# EAGLE board Sensor8535 - eagle (EAGLE 4.09)
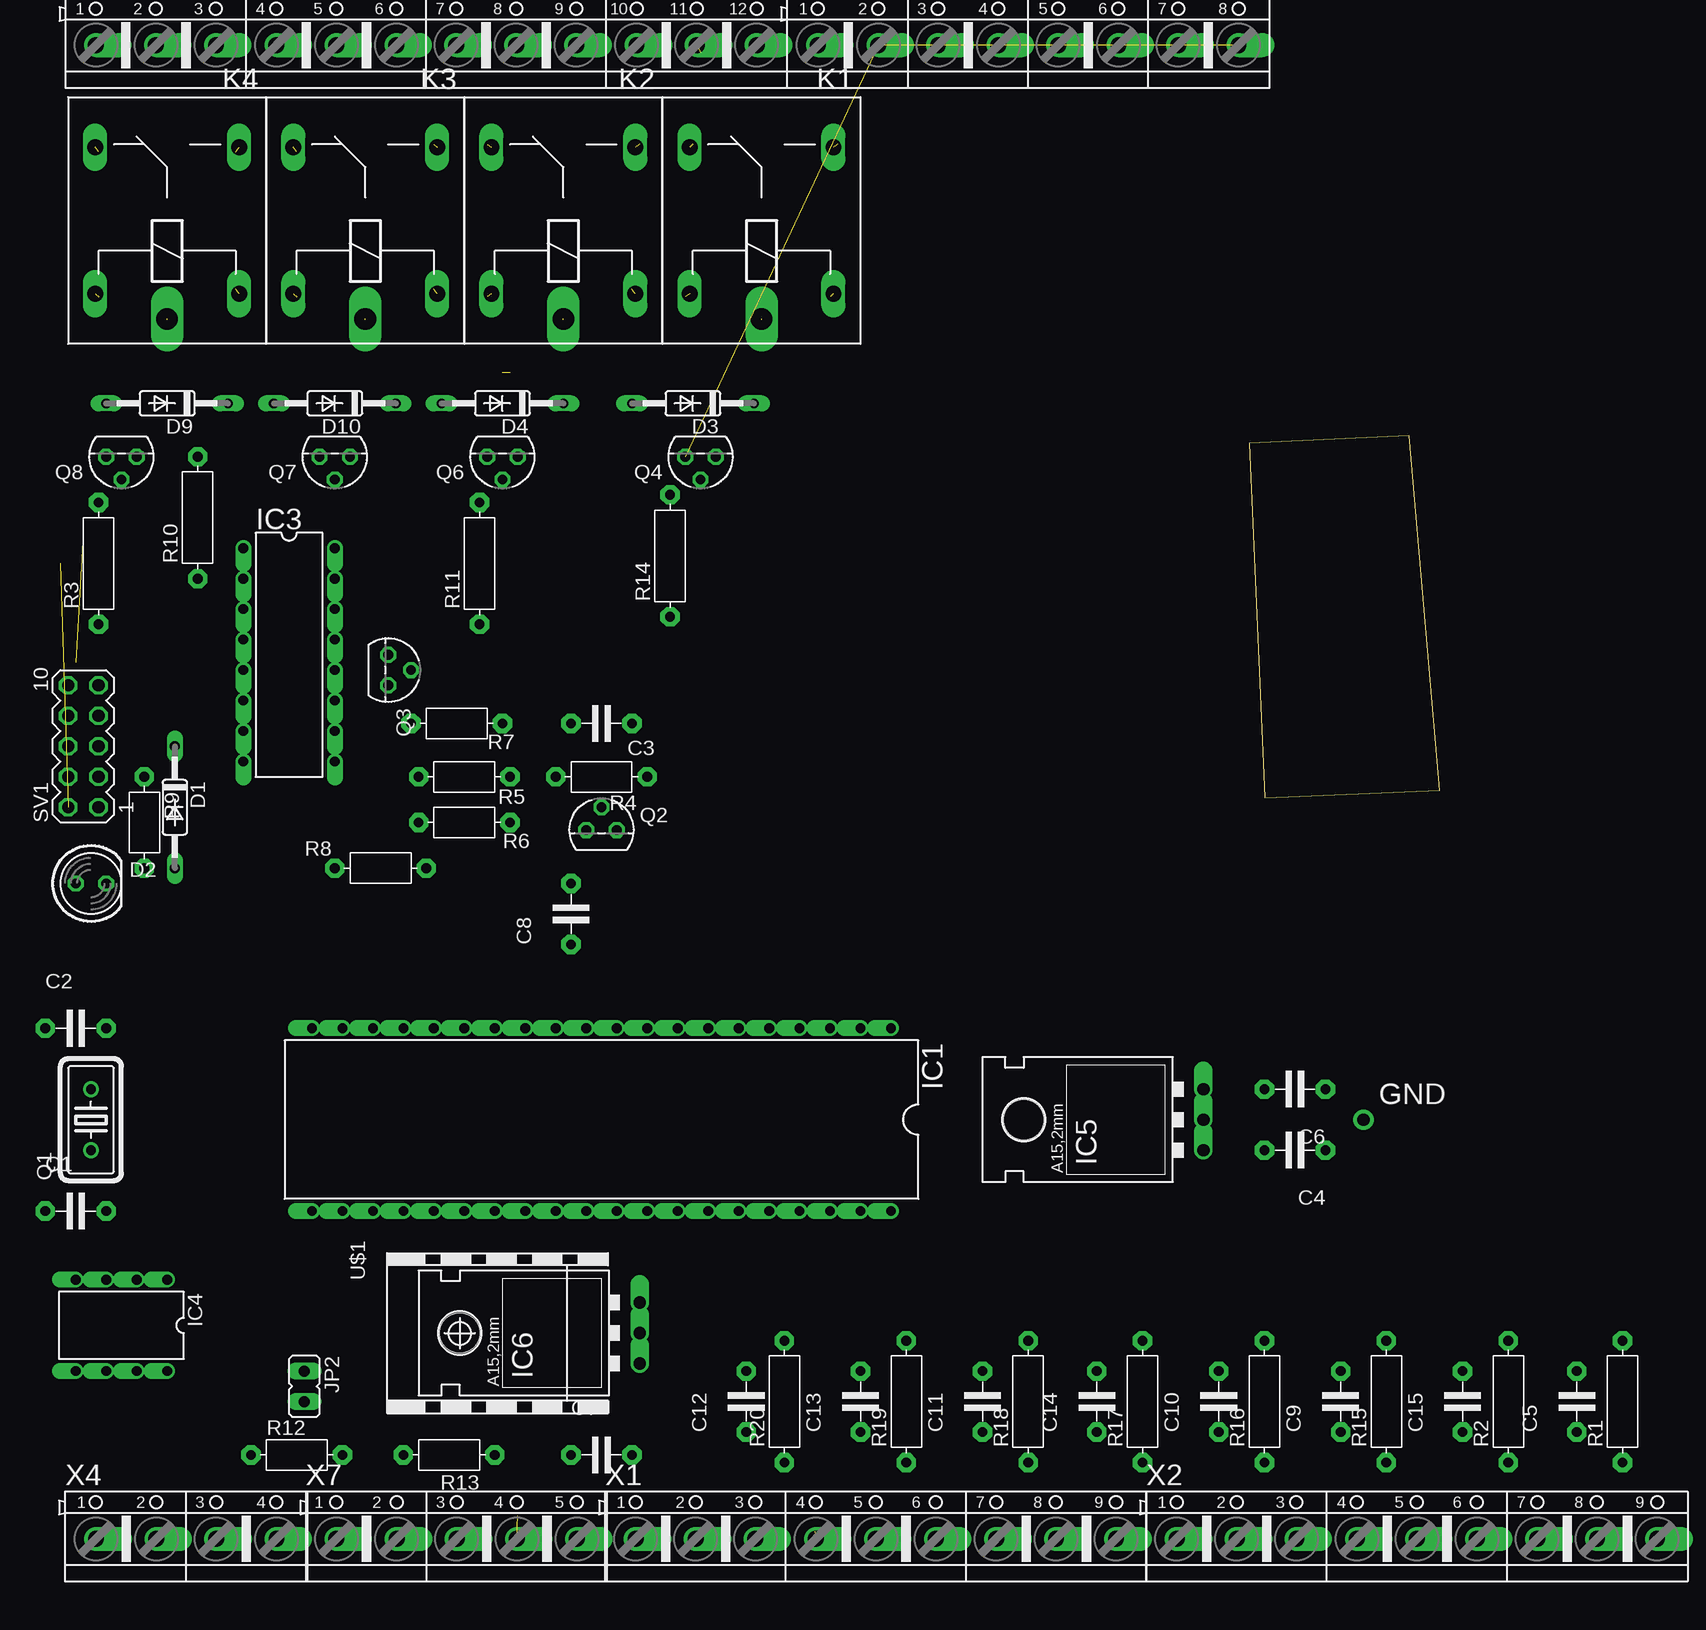
[diagram p0: board, top side]
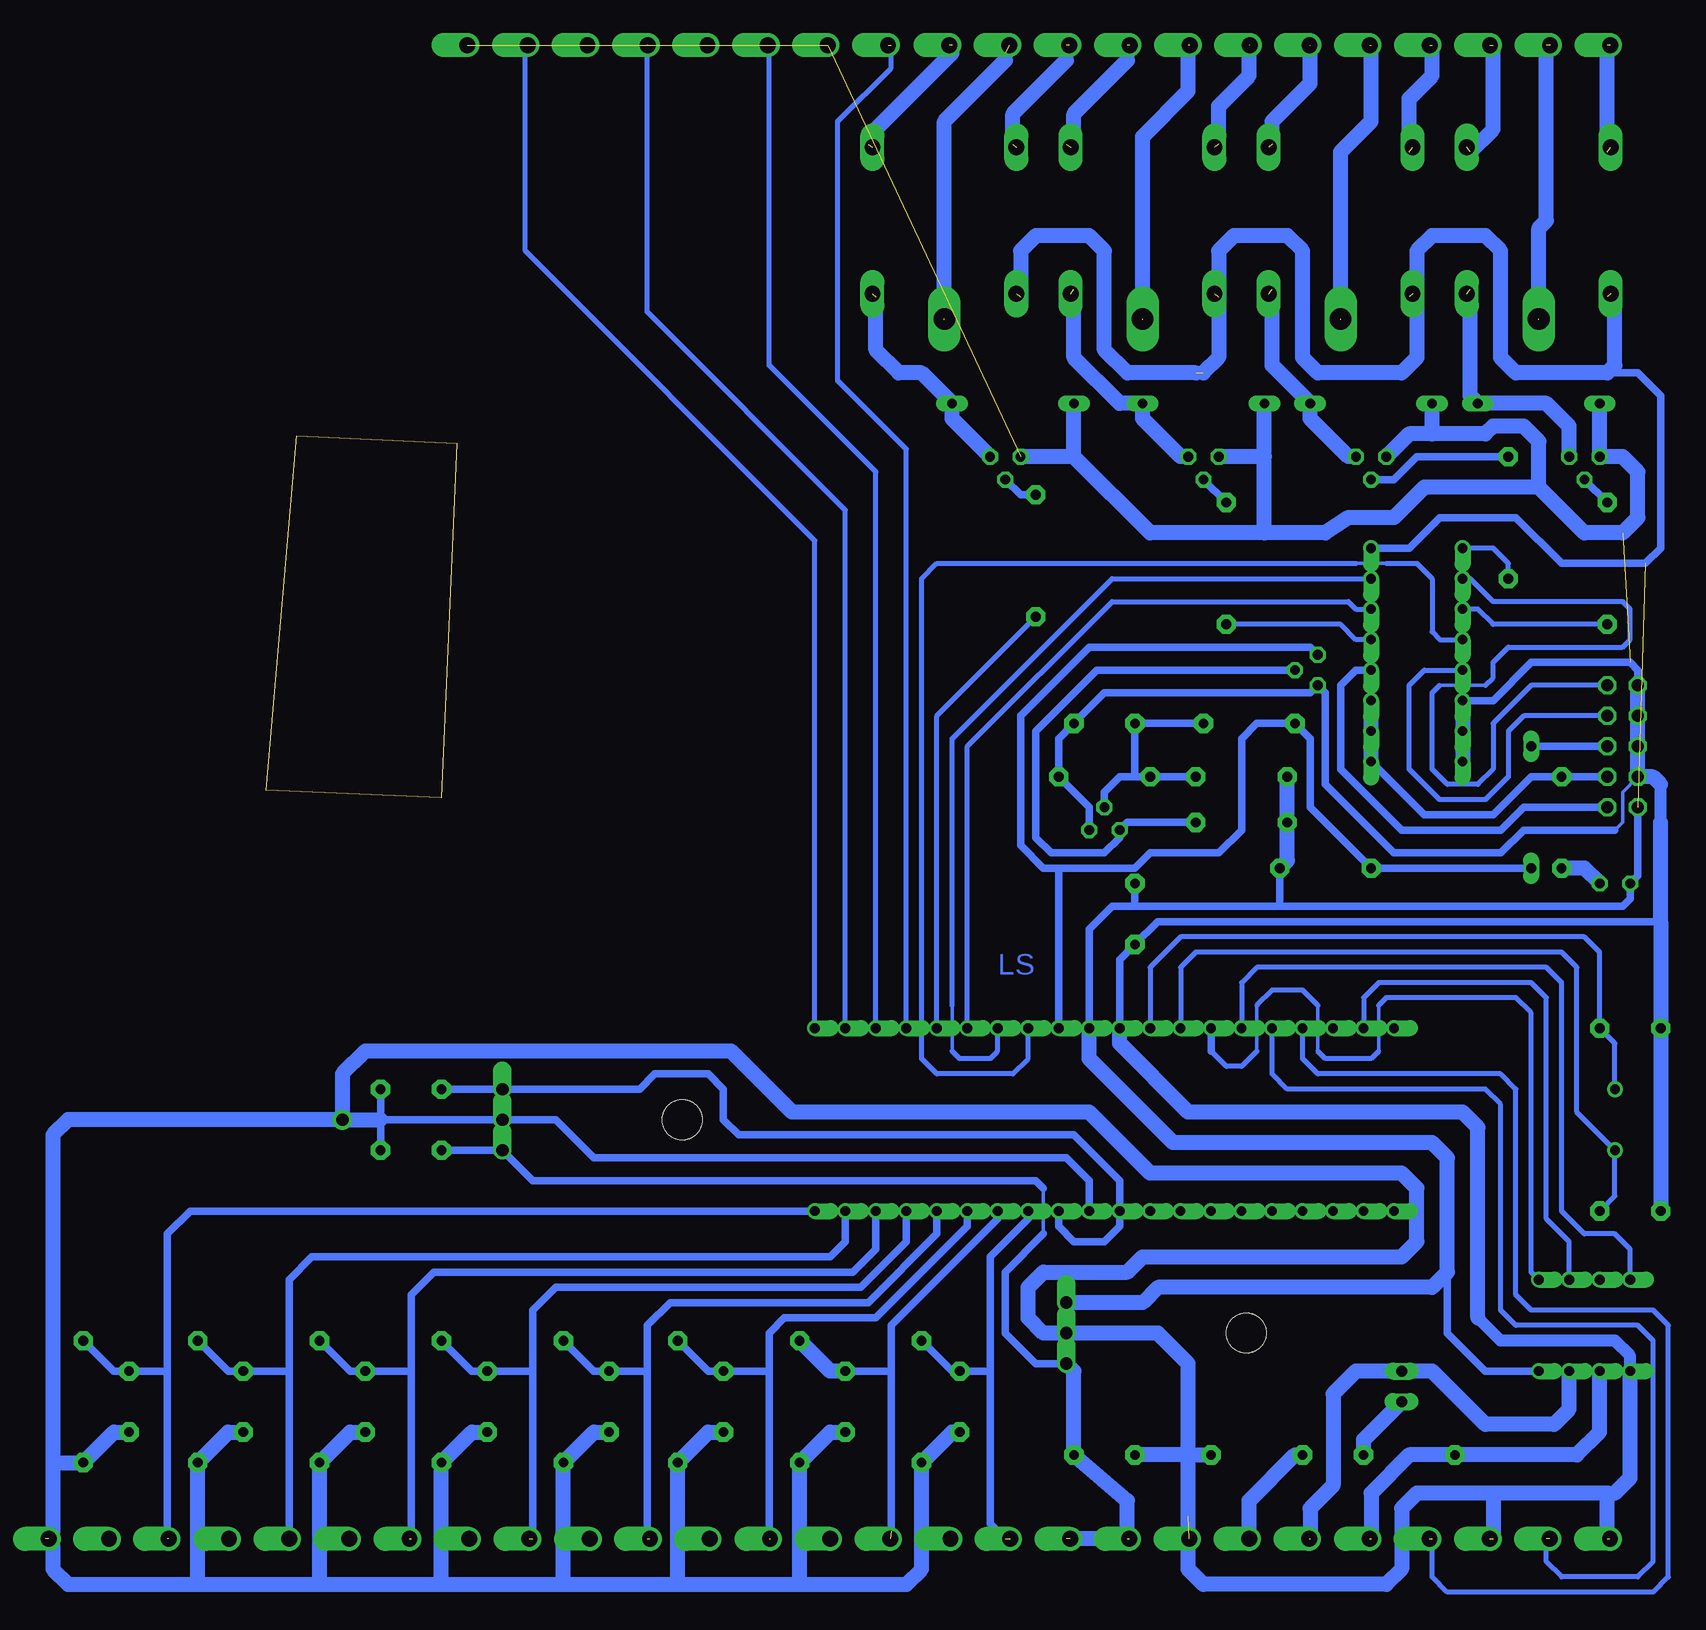
[diagram p1: board, bottom side, seen from below]

Size 15.86 x 30.15 mm. Coordinates in mm from the lower left corner, seen from the top.
Outline: 1.27,0 15.86,0.64 13.32,30.15 0,29.52 1.27,0
Copper layers used: Bottom

## Footprints (pad centres in the part's own frame; a part is rotated, then mirrored left to right if it is on the bottom)
C-5 = drill 0.813 pad 1.6 octagon: 1 -2.54,0; 2 2.54,0
DO35-10 = drill 0.813 long: A 5.08,0; C -5.08,0
LED5MM = drill 0.813 octagon: A -1.27,0; K 1.27,0
DIL40 = drill 0.813 offset: 1 -24.13,-7.62; 2 -21.59,-7.62; 3 -19.05,-7.62; 4 -16.51,-7.62; 5 -13.97,-7.62; 6 -11.43,-7.62; 7 -8.89,-7.62; 8 -6.35,-7.62; 9 -3.81,-7.62; 10 -1.27,-7.62; 11 1.27,-7.62; 12 3.81,-7.62; 13 6.35,-7.62; 14 8.89,-7.62; 15 11.43,-7.62; 16 13.97,-7.62; 17 16.51,-7.62; 18 19.05,-7.62; 19 21.59,-7.62; 20 24.13,-7.62; 21 24.13,7.62; 22 21.59,7.62; 23 19.05,7.62; 24 16.51,7.62; 25 13.97,7.62; 26 11.43,7.62; 27 8.89,7.62; 28 6.35,7.62; 29 3.81,7.62; 30 1.27,7.62; 31 -1.27,7.62; 32 -3.81,7.62; 33 -6.35,7.62; 34 -8.89,7.62; 35 -11.43,7.62; 36 -13.97,7.62; 37 -16.51,7.62; 38 -19.05,7.62; 39 -21.59,7.62; 40 -24.13,7.62
DIL16 = drill 0.813 offset: 1 -8.89,-3.81; 2 -6.35,-3.81; 3 -3.81,-3.81; 4 -1.27,-3.81; 5 1.27,-3.81; 6 3.81,-3.81; 7 6.35,-3.81; 8 8.89,-3.81; 9 8.89,3.81; 10 6.35,3.81; 11 3.81,3.81; 12 1.27,3.81; 13 -1.27,3.81; 14 -3.81,3.81; 15 -6.35,3.81; 16 -8.89,3.81
DIL08 = drill 0.813 offset: 1 -3.81,-3.81; 2 -1.27,-3.81; 3 1.27,-3.81; 4 3.81,-3.81; 5 3.81,3.81; 6 1.27,3.81; 7 -1.27,3.81; 8 -3.81,3.81
78XXL = drill 1.016 offset: GND 0,-3.81; IN -2.54,-3.81; OUT 2.54,-3.81 | hole 3.302: 0,11.176
JP1 = drill 0.914 long: 1 0,-1.27; 2 0,1.27
ZF112 = drill 1.321 long: 1 -6.096,5.994; 2 -6.096,-5.994; O 6.096,5.994; S 6.096,-5.994 | drill 1.803 long: P -8.204,0
HC18U-V = drill 0.813 round: 1 -2.54,0; 2 2.54,0
TO92 = drill 0.813 octagon: 1 1.27,0; 2 0,1.905; 3 -1.27,0
R-10 = drill 0.813 pad 1.6 octagon: 1 -5.08,0; 2 5.08,0
R-7,5 = drill 0.813 pad 1.6 octagon: 1 -3.81,0; 2 3.81,0
MA05-2 = drill 1.016 octagon: 1 -5.08,-1.27; 2 -5.08,1.27; 3 -2.54,-1.27; 4 -2.54,1.27; 5 0,-1.27; 6 0,1.27; 7 2.54,-1.27; 8 2.54,1.27; 9 5.08,-1.27; 10 5.08,1.27
AK500/9 = drill 1.321 offset: 1 -20.015,0; 2 -15.011,0; 3 -10.033,0; 4 -5.004,0; 5 0,0; 6 5.004,0; 7 10.033,0; 8 15.011,0; 9 20.015,0
AK500/8 = drill 1.321 offset: 1 -17.526,0; 2 -12.497,0; 3 -7.518,0; 4 -2.489,0; 5 2.489,0; 6 7.518,0; 7 12.497,0; 8 17.526,0
AK500/4 = drill 1.321 offset: 1 -7.518,0; 2 -2.489,0; 3 2.489,0; 4 7.518,0
AK500/12 = drill 1.321 offset: 1 -27.534,0; 2 -22.53,0; 3 -17.526,0; 4 -12.497,0; 5 -7.493,0; 6 -2.489,0; 7 2.489,0; 8 7.493,0; 9 12.497,0; 10 17.526,0; 11 22.53,0; 12 27.534,0
AK500/5 = drill 1.321 offset: 1 -10.033,0; 2 -5.004,0; 3 0,0; 4 5.004,0; 5 10.008,0

## Placement (x,y rotation side)
C1  27pF  [C-5]  -97.79,-34.45 0 top  (outside the outline)
C2  27pF  [C-5]  -97.79,-19.21 0 top  (outside the outline)
C3  100nF  [C-5]  -53.98,6.19 180 top  (outside the outline)
C4  220nF  [C-5]  3.81,-29.37 180 top  (outside the outline)
C5  470nF  [C-5]  27.3,-50.33 90 top  (outside the outline)
C6  100nF  [C-5]  3.81,-24.29 180 top  (outside the outline)
C7  220nF  [C-5]  -53.98,-54.77 0 top  (outside the outline)
C8  470nF  [C-5]  -56.52,-9.69 90 top  (outside the outline)
C9  470nF  [C-5]  7.62,-50.33 90 top  (outside the outline)
C10  470nF  [C-5]  -2.54,-50.33 90 top  (outside the outline)
C11  470nF  [C-5]  -22.23,-50.33 90 top  (outside the outline)
C12  470nF  [C-5]  -41.91,-50.33 90 top  (outside the outline)
C13  470nF  [C-5]  -32.39,-50.33 90 top  (outside the outline)
C14  470nF  [C-5]  -12.7,-50.33 90 top  (outside the outline)
C15  470nF  [C-5]  17.78,-50.33 90 top  (outside the outline)
D1  1N4148  [DO35-10]  -89.54,-0.8 270 top  (outside the outline)
D2  [LED5MM]  -96.52,-7.15 0 top  (outside the outline)
D3  1N4148  [DO35-10]  -46.36,32.86 180 top  (outside the outline)
D4  1N4148  [DO35-10]  -62.23,32.86 180 top  (outside the outline)
D9  1N4148  [DO35-10]  -90.17,32.86 180 top  (outside the outline)
D10  1N4148  [DO35-10]  -76.2,32.86 180 top  (outside the outline)
IC1  AT90S8535P  [DIL40]  -53.98,-26.83 180 top  (outside the outline)
IC3  4053N  [DIL16]  -80.01,11.9 270 top  (outside the outline)
IC4  MAX481CPA  [DIL08]  -93.98,-43.98 180 top  (outside the outline)
IC5  LM340T05  [78XXL]  -7.62,-26.83 90 top  (outside the outline)
IC6  LM340T05  [78XXL]  -54.61,-44.61 90 top  (outside the outline)
JP2  [JP1]  -78.74,-49.06 180 top  (outside the outline)
K1  ZF112  [ZF112]  -40.64,48.09 90 top  (outside the outline)
K2  ZF112  [ZF112]  -57.15,48.09 90 top  (outside the outline)
K3  ZF112  [ZF112]  -73.66,48.09 90 top  (outside the outline)
K4  ZF112  [ZF112]  -90.17,48.09 90 top  (outside the outline)
Q1  4MHz  [HC18U-V]  -96.52,-26.83 90 top  (outside the outline)
Q2  BC337  [TO92]  -53.98,-2.7 0 top  (outside the outline)
Q3  BC337  [TO92]  -71.76,10.63 270 top  (outside the outline)
Q4  BC337  [TO92]  -45.72,28.41 180 top  (outside the outline)
Q6  BC337  [TO92]  -62.23,28.41 180 top  (outside the outline)
Q7  BC337  [TO92]  -76.2,28.41 180 top  (outside the outline)
Q8  BC337  [TO92]  -93.98,28.41 180 top  (outside the outline)
R1  [R-10]  31.11,-50.33 90 top  (outside the outline)
R2  [R-10]  21.59,-50.33 90 top  (outside the outline)
R3  [R-10]  -95.89,19.52 90 top  (outside the outline)
R4  6.8k  [R-7,5]  -53.98,1.74 0 top  (outside the outline)
R5  43k  [R-7,5]  -65.41,1.74 180 top  (outside the outline)
R6  10k  [R-7,5]  -65.41,-2.07 180 top  (outside the outline)
R7  1M  [R-7,5]  -66.04,6.19 0 top  (outside the outline)
R8  10k  [R-7,5]  -72.39,-5.88 0 top  (outside the outline)
R9  150  [R-7,5]  -92.08,-2.07 270 top  (outside the outline)
R10  [R-10]  -87.63,23.33 90 top  (outside the outline)
R11  [R-10]  -64.14,19.52 90 top  (outside the outline)
R12  120  [R-7,5]  -79.38,-54.77 0 top  (outside the outline)
R13  100  [R-7,5]  -66.68,-54.77 180 top  (outside the outline)
R14  [R-10]  -48.26,20.16 90 top  (outside the outline)
R15  [R-10]  11.43,-50.33 90 top  (outside the outline)
R16  [R-10]  1.27,-50.33 90 top  (outside the outline)
R17  [R-10]  -8.89,-50.33 90 top  (outside the outline)
R18  [R-10]  -18.42,-50.33 90 top  (outside the outline)
R19  [R-10]  -28.58,-50.33 90 top  (outside the outline)
R20  [R-10]  -38.74,-50.33 90 top  (outside the outline)
SV1  ISP  [MA05-2]  -97.16,4.28 90 top  (outside the outline)
U$1  [D02A-L]  -60.33,-44.61 0 top  (outside the outline)
X1  [AK500/9]  -31.12,-61.76 0 top  (outside the outline)
X2  [AK500/9]  13.97,-61.76 0 top  (outside the outline)
X3  [AK500/8]  -18.42,62.7 0 top  (outside the outline)
X4  [AK500/4]  -88.59,-61.76 0 top  (outside the outline)
X5  [AK500/12]  -68.58,62.7 0 top  (outside the outline)
X7  [AK500/5]  -66.04,-61.76 0 top  (outside the outline)

## Library data of the parts
C1-C15 R1-R20 = discrete
D1 D3 D4 D9 D10 = diode
D2 = led
IC1 = atmel
IC3 = 40xx
IC4 = maxim
IC5 IC6 = v-reg
JP2 = jumper
K1-K4 = relay
Q1 = crystal
Q2-Q4 Q6-Q8 = transistor-npn
SV1 = con-lstb
U$1 = heatsink
X1-X5 X7 = con-ptr500

## Nets
(MISO)PB6: IC1.7 IC3.15
(MOSI)PB5: IC1.6 IC3.14
(SCK)PB7: IC1.8 IC3.4
+5V: C8.2 D2.A IC1.10 IC3.16 IC4.8 IC6.OUT K1.1 K2.1 K3.1 K4.1 R5.2 R6.2 R8.2 SV1.2
A: IC4.6 R12.1 X7.1
ADC0: C5.2 IC1.40 R1.2 X2.7
ADC1: C15.2 IC1.39 R2.2 X2.5
ADC2: C9.2 IC1.38 R15.2 X2.3
ADC3: C10.2 IC1.37 R16.2 X2.1
ADC4: C14.2 IC1.36 R17.2 X1.8
ADC5: C11.2 IC1.35 R18.2 X1.6
ADC6: C13.2 IC1.34 R19.2 X1.4
ADC7: C12.2 IC1.33 R20.2 X1.2
AVCC: C6.2 IC1.30 IC1.32 IC5.OUT
B: IC4.7 JP2.1 X7.2
CLK1: C1.2 IC1.13 Q1.1
CLK2: C2.2 IC1.12 Q1.2
LED_ENABLE: IC3.9 IC3.10 IC3.11 R9.1 SV1.3
MISO: IC3.2 SV1.9
MOSI: IC3.12 SV1.1
N$1: R13.2 X7.3
N$3: K1.O X5.10
N$4: D3.C K1.2 Q4.3
N$5: D2.K R9.2
N$6: K2.O X5.7
N$7: Q2.3 Q3.2 R6.1
N$8: D4.C K2.2 Q6.3
N$9: C3.2 Q2.2 R4.1 R5.1 R7.2
N$11: JP2.2 R12.2
N$12: D10.C K3.2 Q7.3
N$13: D9.C K4.2 Q8.3
N$14: K3.O X5.4
N$15: Q4.2 R14.2
N$16: Q6.2 R11.2
N$19: Q7.2 R10.2
N$20: Q8.2 R3.2
N$21: K1.S X5.12
N$22: K2.S X5.9
N$23: K3.S X5.6
N$24: K4.S X5.3
N$25: K4.O X5.1
N$26: K4.P X5.2
N$27: K3.P X5.5
N$28: K2.P X5.8
N$29: K1.P X5.11
P-RESET: D1.C SV1.5
PB0: IC1.1 X3.7
PB1: IC1.2 X3.5
PB2: IC1.3 X3.3
PB3: IC1.4 X3.1
PB4: IC1.5 R14.1
PB5: IC3.13 R11.1
PB6: IC3.1 R10.1
PB7: IC3.3 R3.1
PD0: IC1.14 IC4.1
PD1: IC1.15 IC4.4
PD2: IC1.16 X4.2
PD3: IC1.17 X4.4
PD4: IC1.18
PD5: IC1.19 IC4.2 IC4.3
PD6: IC1.20
PD7: IC1.21
PE: C1.1 C2.1 C3.1 C4.1 C5.1 C6.1 C7.1 C8.1 C9.1 C10.1 C11.1 C12.1 C13.1 C14.1 C15.1 D3.A D4.A D9.A D10.A IC1.11 IC1.31 IC3.6 IC3.7 IC3.8 IC4.5 IC5.GND IC6.GND Q2.1 Q3.1 Q4.1 Q6.1 Q7.1 Q8.1 R1.1 R2.1 R4.2 R13.1 R15.1 R16.1 R17.1 R18.1 R19.1 R20.1 SV1.4 SV1.6 SV1.8 SV1.10 X2.9 X3.2 X3.4 X3.6 X3.8 X4.1 X4.3 X7.4
RST: D1.A IC1.9 Q3.3 R7.1 R8.1
SCK: IC3.5 SV1.7
VCC: C4.2 C7.2 IC5.IN IC6.IN X1.1 X7.5

## Tracks (layer width: path | path; a pad name or v marks a point on that pad's centre or on a via)
(MISO)PB6
  Bottom 0.305: -41.28,-21.12 -41.28,-17.31
  Bottom 0.406: IC1.7 -45.09,-21.12 -44.45,-21.75 -41.91,-21.75 -41.28,-21.12 | -41.28,-17.31 -41.28,4.92 -54.61,18.25 IC3.15
(MOSI)PB5
  Bottom 0.406: IC1.6 -42.55,4.28 -54.61,16.34 -74.3,16.34 -74.93,15.71 IC3.14
(SCK)PB7
  Bottom 0.305: -74.93,19.52 -77.47,19.52
  Bottom 0.406: IC1.8 -47.63,-21.75 -46.36,-23.02 -40.01,-23.02 -38.74,-21.75 -38.74,18.25 -40.01,19.52 -74.93,19.52 | IC3.4 -81.92,13.17 -81.28,13.81 -81.28,18.25 -80.01,19.52 -77.47,19.52
+5V  (6 unrouted)
  Bottom 0.61: SV1.2 -98.43,-6.52 D2.A -97.79,-8.42 -97.16,-9.05 -68.58,-9.05 | -56.52,-9.05 -68.58,-9.05 | -56.52,-9.05 -54.61,-9.05 -52.71,-10.96 IC1.10 | IC3.16 -79.38,20.79 -81.92,23.33 -88.27,23.33 -92.08,19.52 -99.06,19.52 -100.33,20.79 -100.33,33.49 -98.43,35.4 -95.89,35.4 | -68.58,-9.05 R8.2 | -56.52,-9.05 C8.2 | IC4.8 -85.73,-47.79 -82.55,-44.61 -82.55,-39.53
  Bottom 1.27: -79.38,42.38 -79.38,41.75 -80.01,41.11 | -63.5,41.75 -63.5,40.48 | -46.99,41.11 -46.99,41.75 -46.99,45.56 -48.26,46.83 -52.71,46.83 -53.98,45.56 -53.98,37.3 -55.88,35.4 -61.6,35.4 | -95.89,41.75 -96.52,41.75 -96.52,36.03 -95.89,35.4 -88.27,35.4 -87,36.67 -87,45.56 -85.73,46.83 -81.28,46.83 -80.01,45.56 -80.01,41.11 | -80.01,41.11 -80.01,36.67 -78.74,35.4 -71.76,35.4 -70.49,36.67 -70.49,45.56 -69.22,46.83 -64.77,46.83 -63.5,45.56 -63.5,41.75 | -62.23,35.4 -63.5,36.67 -63.5,41.75 | R5.2 R6.2 -69.22,-5.24 R8.2 | IC1.10 -52.71,-21.75 -59.69,-28.74 -81.28,-28.74 -82.55,-30.01 -82.55,-39.53 -81.28,-40.8 -58.42,-40.8 -57.15,-42.07 IC6.OUT
A  (1 unrouted)
  Bottom 1.27: IC4.6 -95.25,-52.87 -93.35,-54.77 R12.1 -79.38,-54.77 -76.2,-57.95 -76.2,-61.76
ADC0  (1 unrouted)
  Bottom 0.61: R1.2 28.57,-47.79 C5.2 24.12,-47.79 | IC1.40 22.22,-34.45 24.12,-36.36 24.12,-47.79 | 24.12,-47.79 24.12,-61.76
ADC1
  Bottom 0.61: R2.2 19.05,-47.79 C15.2 13.97,-47.79 | IC1.39 -32.39,-36.99 -31.12,-38.26 12.06,-38.26 13.97,-40.17 13.97,-47.79 | 13.97,-47.79 X2.5
ADC2  (1 unrouted)
  Bottom 0.61: R15.2 8.89,-47.79 C9.2 3.81,-47.79 | IC1.38 -34.93,-37.63 -33.02,-39.53 1.9,-39.53 3.81,-41.44 3.81,-47.79 | 3.81,-47.79 3.81,-61.76
ADC3  (1 unrouted)
  Bottom 0.61: R16.2 -1.27,-47.79 C10.2 -6.35,-47.79 -6.35,-42.71 | IC1.37 -37.47,-36.99 -33.66,-40.8 -8.26,-40.8 -6.35,-42.71 | -6.35,-42.71 -6.35,-61.76
ADC4  (1 unrouted)
  Bottom 0.61: R17.2 -11.43,-47.79 C14.2 -15.88,-47.79 | IC1.36 -40.01,-36.36 -34.29,-42.07 -17.78,-42.07 -15.88,-43.98 -15.88,-47.79 | -15.88,-61.76 -15.88,-47.79
ADC5  (1 unrouted)
  Bottom 0.61: R18.2 -20.96,-47.79 C11.2 -26.04,-47.79 | IC1.35 -42.55,-35.72 -34.93,-43.34 -27.31,-43.34 -26.04,-44.61 -26.04,-47.79 | -26.04,-61.76 -26.04,-47.79
ADC6  (1 unrouted)
  Bottom 0.61: IC1.34 -45.09,-35.09 -36.2,-43.98 -36.2,-47.79 | -36.2,-61.12 -36.2,-47.79 | -36.2,-47.79 C13.2
  Bottom 1.27: C13.2 -31.12,-47.79 R19.2
ADC7  (1 unrouted)
  Bottom 0.61: R20.2 -41.28,-47.79 C12.2 -44.45,-47.79 | IC1.33 -47.63,-35.09 -44.45,-38.26 -44.45,-47.79 | -44.45,-47.79 -44.45,-56.04 -44.45,-60.49 -45.72,-61.76
AVCC
  Bottom 0.61: IC1.32 -50.17,-35.72 -51.44,-36.99 -53.98,-36.99 -55.25,-35.72 IC1.30 -55.25,-31.91 -51.44,-28.1 -23.5,-28.1 -22.23,-26.83 -22.23,-24.29 -20.96,-23.02 -16.51,-23.02 -15.24,-24.29 IC5.OUT C6.2
B  (1 unrouted)
  Bottom 1.27: -71.12,-61.76 -71.12,-59.22 -73.03,-57.31 -73.03,-49.69 -74.93,-47.79 JP2.1 -81.28,-47.79 -85.73,-52.23 -91.44,-52.23 -92.71,-50.96 IC4.7
CLK1
  Bottom 0.406: C1.2 -96.52,-33.18 Q1.1 -93.35,-26.2 -93.35,-14.13 -92.08,-12.86 -61.6,-12.86 -60.33,-14.13 IC1.13
CLK2
  Bottom 0.406: Q1.2 -96.52,-20.48 C2.2 -95.25,-12.86 -93.98,-11.59 -60.33,-11.59 -57.79,-14.13 IC1.12
LED_ENABLE
  Bottom 0.61: SV1.3 R9.1 -89.54,1.74 -86.36,-1.44 -80.65,-1.44 IC3.9
  Bottom 1.27: IC3.11 IC3.10 IC3.9
MISO
  Bottom 0.305: -81.92,9.36 -85.73,9.36
  Bottom 0.406: SV1.9 -89.54,9.36 -86.36,6.19 -86.36,2.38 -85.09,1.11 -82.55,1.11 -81.28,2.38 -81.28,8.73 -81.92,9.36 | -85.73,9.36 -86.36,10 -86.36,11.27 -87.63,12.54 -97.16,12.54 -97.79,13.17 -97.79,15.71 -97.16,16.34 -86.36,16.34 -84.46,18.25 IC3.2
MOSI
  Bottom 0.61: IC3.12 -74.93,10.63 -73.66,9.36 -73.66,2.38 -78.74,-2.7 -87,-2.7 -88.9,-0.8 SV1.1
N$1
  Bottom 1.27: X7.3 -66.04,-58.58 -69.85,-54.77 R13.2
N$3  (2 unrouted)
  Bottom 1.27: -50.8,62.7 -50.8,61.43 -46.36,56.98 -46.36,54.45
N$4  (1 unrouted)
  Bottom 1.27: -34.93,41.75 -34.93,37.3 -36.83,35.4 -38.74,35.4 D3.C -41.28,31.59 Q4.3
N$5
  Bottom 1.27: D2.K -93.98,-5.88 R9.2
N$6  (2 unrouted)
  Bottom 1.27: -66.04,62.7 -66.04,60.16 -63.5,57.62 -63.5,54.45
N$7
  Bottom 0.61: Q3.2 -53.34,10.63 -48.26,5.55 -48.26,-3.34 -49.53,-4.61 -53.98,-4.61 -55.25,-3.34 Q2.3 -55.88,-2.07 R6.1
N$8  (1 unrouted)
  Bottom 1.27: -51.44,42.38 -51.44,36.67 -55.25,32.86 D4.C -57.15,31.59 -60.33,28.41 Q6.3
N$9
  Bottom 0.61: R7.2 C3.2 -56.52,1.74 | R5.1 R4.1 -56.52,1.74 | Q2.2 -53.98,0.47 -55.25,1.74 -56.52,1.74
N$11
  Bottom 1.27: R12.2 -75.57,-53.5 JP2.2
N$12  (1 unrouted)
  Bottom 1.27: -67.95,42.38 -67.95,36.03 D10.C -71.12,31.59 -74.3,28.41 Q7.3
N$13  (1 unrouted)
  Bottom 1.27: -84.46,42.38 -84.46,33.49 D9.C -90.81,32.86 -92.71,30.95 Q8.3
N$14  (2 unrouted)
  Bottom 1.27: -81.28,62.7 -81.28,60.16 -79.38,58.26 -79.38,53.81
N$15
  Bottom 0.61: R14.2 -46.99,25.23 Q4.2
N$16
  Bottom 0.61: R11.2 Q6.2
N$19
  Bottom 0.61: R10.2 -80.01,28.41 -78.11,26.51 Q7.2
N$20
  Bottom 0.61: R3.2 Q8.2
N$21  (2 unrouted)
  Bottom 1.27: -41.28,62.7 -41.28,62.07 -34.93,55.72 -34.93,55.08 -34.29,54.45
N$22  (2 unrouted)
  Bottom 1.27: -55.88,62.7 -55.88,61.43 -51.44,56.98 -51.44,55.08 -50.8,54.45
N$23  (2 unrouted)
  Bottom 1.27: -71.12,62.7 -71.12,59.52 -67.95,56.35 -67.95,54.45
N$24  (2 unrouted)
  Bottom 1.27: -86.36,62.7 -86.36,55.72 -84.46,53.81
N$25  (2 unrouted)
  Bottom 1.27: -95.89,53.81 -95.89,62.7
N$26  (2 unrouted)
  Bottom 1.27: -90.81,62.7 -90.81,48.09 -90.17,47.46 -90.17,39.84
N$27  (2 unrouted)
  Bottom 1.27: -76.2,62.7 -76.2,56.35 -73.66,53.81 -73.66,39.84
N$28  (2 unrouted)
  Bottom 1.27: -60.96,62.7 -60.96,58.89 -57.15,55.08 -57.15,39.84
N$29  (2 unrouted)
  Bottom 1.27: -45.72,62.07 -45.72,61.43 -40.64,56.35 -40.64,39.84
P-RESET
  Bottom 0.61: SV1.5 D1.C
PB0  (1 unrouted)
  Bottom 0.406: IC1.1 -29.85,21.42 -5.72,45.56 -5.72,62.07 -6.35,62.7
PB1  (1 unrouted)
  Bottom 0.406: IC1.2 -32.39,23.97 -15.88,40.48 -15.88,62.7
PB2  (1 unrouted)
  Bottom 0.406: IC1.3 -34.93,27.14 -26.04,36.03 -26.04,62.7
PB3  (1 unrouted)
  Bottom 0.406: IC1.4 -37.47,29.05 -31.75,34.76 -31.75,56.35 -36.2,60.8 -36.2,62.7
PB4
  Bottom 0.406: IC1.5 -40.01,6.82 R14.1
PB5
  Bottom 0.406: IC3.13 -74.93,13.17 -73.66,14.44 R11.1
PB6
  Bottom 0.406: IC3.1 -86.36,20.79 -87.63,19.52 R10.1
PB7
  Bottom 0.406: R3.1 -86.36,14.44 -85.09,15.71 IC3.3
PD0
  Bottom 0.305: -76.84,-17.31 -76.84,-21.12 | -71.76,-21.12 -71.76,-17.31 | -66.68,-17.31 -66.68,-21.12
  Bottom 0.406: IC4.1 -89.54,-39.53 -89.54,-17.94 -88.27,-16.67 -77.47,-16.67 -76.84,-17.31 | -66.68,-21.12 -65.41,-22.39 -64.14,-22.39 -62.87,-21.12 | -76.84,-21.12 -76.2,-21.75 -72.39,-21.75 -71.76,-21.12 | -71.76,-17.31 -70.49,-16.04 -67.95,-16.04 -66.68,-17.31
  Bottom 0.61: -62.87,-21.12 IC1.14
PD1
  Bottom 0.406: IC4.4 -97.79,-37.63 -96.52,-36.36 -93.98,-36.36 -92.08,-34.45 -92.08,-15.4 -90.81,-14.13 -66.68,-14.13 -65.41,-15.4 IC1.15
PD2  (1 unrouted)
  Bottom 0.406: IC1.16 -67.95,-23.02 -69.22,-24.29 -85.73,-24.29 -87,-25.56 -87,-42.71 -88.27,-43.98 -98.43,-43.98 -99.7,-45.25 -99.7,-63.66 -98.43,-64.94 -92.08,-64.94 -90.81,-63.66 -90.81,-61.76
PD3  (1 unrouted)
  Bottom 0.406: IC1.17 -70.49,-21.75 -71.76,-23.02 -87,-23.02 -88.27,-24.29 -88.27,-41.44 -89.54,-42.71 -99.7,-42.71 -100.97,-43.98 -100.97,-64.94 -99.7,-66.2 -82.55,-66.2 -81.28,-64.94 -81.28,-61.76
PD5
  Bottom 0.406: IC4.3 IC4.2 -92.71,-36.99 -90.81,-35.09 -90.81,-16.67 -89.54,-15.4 -76.84,-15.4 -75.57,-16.67 IC1.19
PE  (via drill 1.02 pad 1.68)  (9 unrouted)
  Bottom 0.305: SV1.4 -97.16,0.47 -97.16,-2.07 -96.52,-2.7
  Bottom 0.61: SV1.4 SV1.6 | -96.52,-2.7 -88.9,-2.7 -87,-4.61 -78.11,-4.61 -72.39,1.11 -72.39,8.73 Q3.1 -71.12,8.73 -53.98,8.73 C3.1 -50.17,4.92 R4.2 -52.71,-0.8 Q2.1 | SV1.10 -98.43,10.63 -97.79,11.27 -89.54,11.27 -86.36,8.09 IC3.6 | IC1.11 -55.25,-13.5 C8.1 -58.42,-10.33 -100.33,-10.33 | IC1.31 -52.71,-31.91 -50.8,-30.01 -11.43,-30.01 -8.26,-26.83 IC5.GND 6.35,-26.83 | 6.35,-26.83 C6.1 | 6.35,-26.83 C4.1
  Bottom 1.016: IC4.5 -97.79,-46.52 -96.52,-45.25 -87,-45.25 -85.09,-43.34 | -100.33,-2.07 -100.33,1.11
  Bottom 1.27: IC3.6 IC3.7 IC3.8 | SV1.10 SV1.8 SV1.6 SV1.4 -99.7,1.74 -100.33,1.11 | -28.58,-65.57 -37.47,-65.57 -38.74,-64.3 R20.1 -41.28,-52.87 C12.1 | -18.42,-65.57 -28.58,-65.57 | -8.89,-65.57 -18.42,-65.57 | 1.27,-65.57 -8.89,-65.57 | 11.43,-65.57 1.27,-65.57 | 21.59,-65.57 11.43,-65.57 | 21.59,-65.57 32.38,-65.57 33.65,-64.3 33.65,-62.39 34.29,-61.76 33.65,-61.12 33.65,-55.41 | C5.1 28.57,-52.87 R1.1 33.65,-55.41 | C15.1 19.05,-52.87 R2.1 21.59,-65.57 | C9.1 8.89,-52.87 R15.1 11.43,-65.57 | C10.1 -1.27,-52.87 R16.1 1.27,-65.57 | C13.1 -31.12,-52.87 R19.1 -28.58,-65.57 | C11.1 -20.96,-52.87 R18.1 -18.42,-65.57 | C14.1 -11.43,-52.87 R17.1 -8.89,-65.57 | D9.A Q8.1 -97.16,28.41 -98.43,27.14 -98.43,23.33 -97.16,22.06 -93.98,22.06 -90.17,25.87 | -67.31,28.41 D4.A | -67.31,28.41 Q6.1 | -51.44,28.41 D3.A | -51.44,28.41 Q4.1 | -51.44,28.41 -57.79,22.06 -67.31,22.06 | -67.31,22.06 -72.39,22.06 -74.3,23.33 -78.11,23.33 -80.65,25.87 -90.17,25.87 | -67.31,22.06 -67.31,28.41 | -90.17,25.87 -90.17,29.68 -88.9,30.95 -86.36,30.95 -85.73,30.31 -81.28,30.31 | -81.28,30.31 -79.38,30.31 Q7.1 | -81.28,30.31 D10.A | C1.1 C2.1 -100.33,-10.33 -100.33,-2.07 | -60.96,-54.77 -60.96,-59.85 -60.96,-64.3 -62.23,-65.57 -77.47,-65.57 -78.74,-64.3 -78.74,-59.22 -80.01,-57.95 -86.36,-57.95 | IC1.11 -55.25,-20.48 -60.96,-26.2 -83.82,-26.2 -85.09,-27.47 -85.09,-43.34 | IC4.5 -97.79,-56.68 -96.52,-57.95 -95.89,-57.95 | -95.89,-61.76 -95.89,-57.95 | -95.89,-57.95 -86.36,-57.95 | -86.36,-57.95 -86.36,-61.76 | -60.96,-54.77 C7.1 | -60.96,-54.77 R13.1 | -60.96,-54.77 -60.96,-47.16 -58.42,-44.61 IC6.GND -48.9,-44.61 -47.63,-43.34 -47.63,-40.8 -48.9,-39.53 -55.88,-39.53 -57.15,-38.26 -78.74,-38.26 -80.01,-36.99 -80.01,-32.55 -78.74,-31.28 -57.79,-31.28 -52.71,-26.2 -27.94,-26.2 -22.86,-21.12 7.62,-21.12 9.52,-23.02 v9.52,-26.83
  Bottom 1.27: 33.65,-55.41 33.65,-28.1 32.38,-26.83 v9.52,-26.83 | v9.52,-26.83 6.35,-26.83
RST
  Bottom 0.61: -78.11,-5.88 -78.74,-5.88 | D1.A -78.11,-5.88 | -78.11,-5.88 R8.1 -71.12,-0.8 -71.12,4.92 R7.1 -66.68,6.19 -65.41,4.92 -65.41,-2.7 -63.5,-4.61 -57.79,-4.61 -56.52,-5.88 -50.17,-5.88 | -50.17,-5.88 IC1.9 | Q3.3 -71.12,12.54 -52.71,12.54 -46.99,6.82 -46.99,-3.97 -48.9,-5.88 -50.17,-5.88
SCK
  Bottom 0.406: IC3.5 -80.65,10.63 -79.38,9.36 -79.38,2.38 -81.92,-0.16 -85.73,-0.16 -87.63,1.74 -87.63,5.55 -88.9,6.82 SV1.7
VCC  (2 unrouted)
  Bottom 0.305: -48.9,-36.36 -48.9,-32.55
  Bottom 0.61: IC6.IN -48.26,-47.16 -45.72,-44.61 -45.72,-39.53 -48.9,-36.36 | -48.9,-32.55 -48.26,-31.91 -6.35,-31.91 IC5.IN C4.2
  Bottom 1.27: IC6.IN -51.44,-47.79 C7.2 -55.88,-58.58 -55.88,-61.76 -50.8,-61.76

## Text on the board
Bottom: LS
tPlace: GND